# Altium PCB РАЗВОДКА 2.PcbDoc (part 2 of 2)
Units mm, origin at the board's own origin, x right, y up, seen from the top; angles counter-clockwise.
Board outline 81.25 x 50.02 mm, 2 copper layers (Top Layer, Bottom Layer); 71 components, 46 nets, 302 pads, 66 vias.
Unrouted connection lines stored in the file: 1.
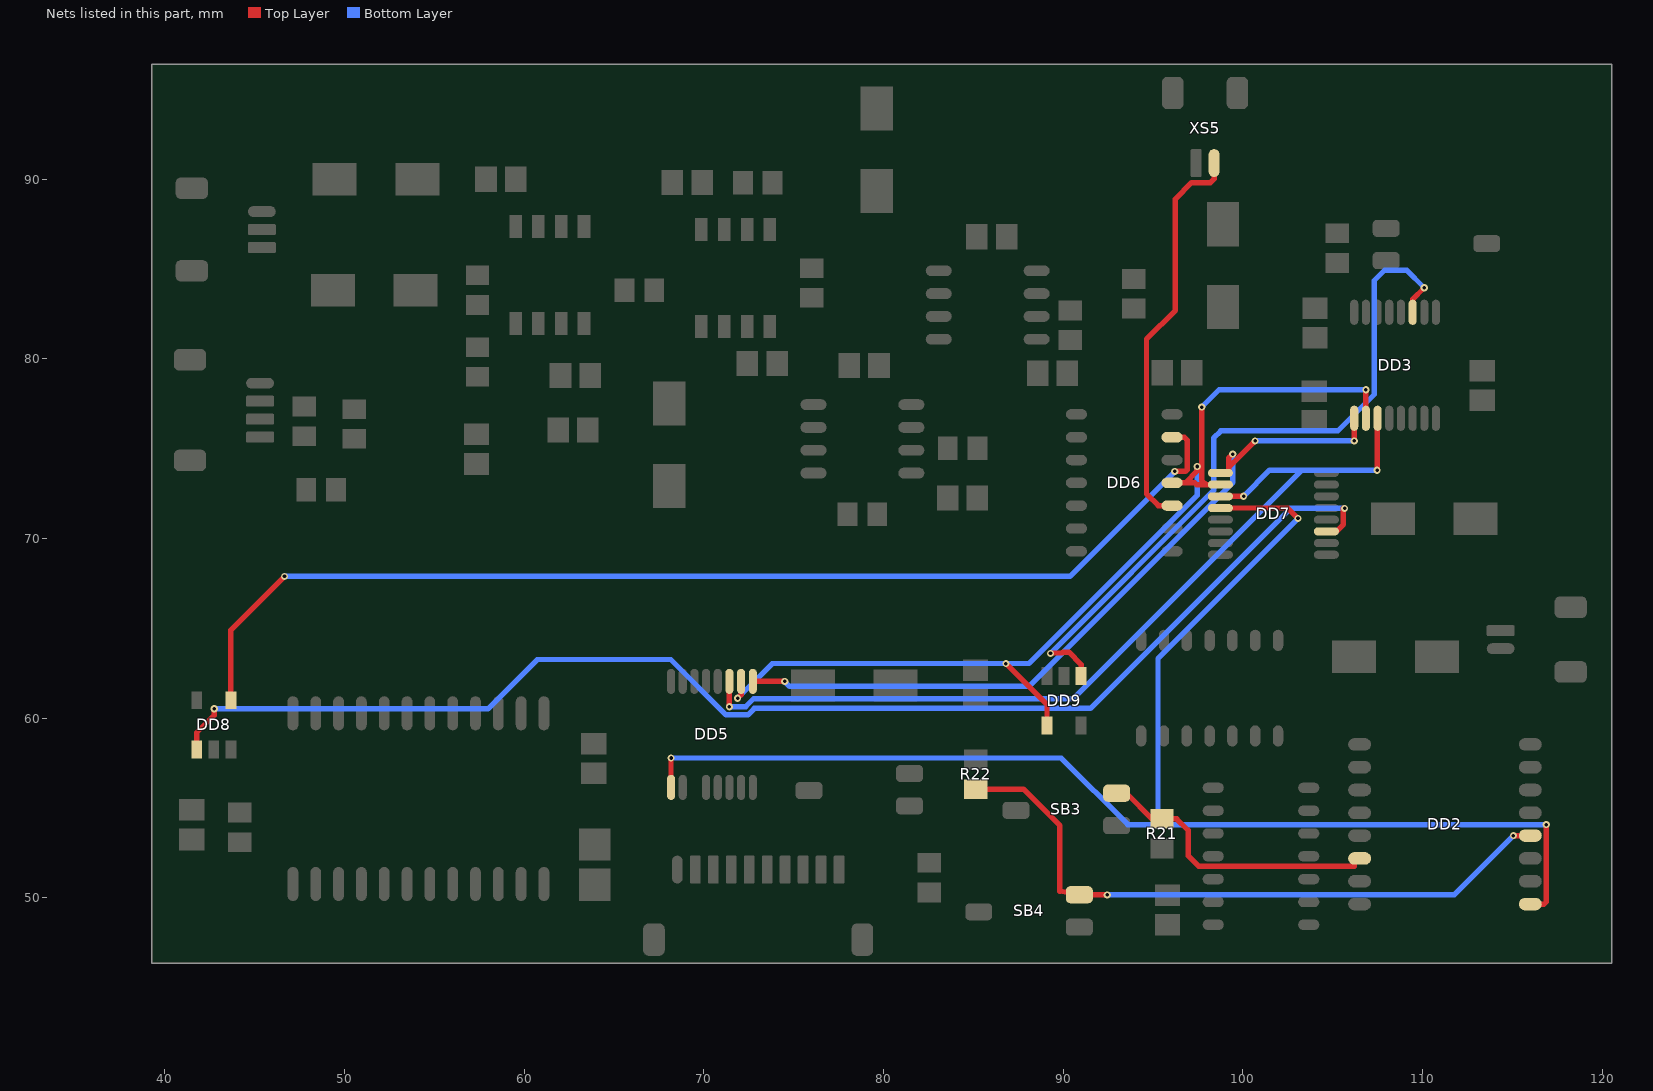
[diagram p2: the nets of this part, all layers, seen from the top]

## Via types
v1: diameter 0.4, hole 0.2, Top Layer to Bottom Layer, 62 vias
v2: diameter 3.8, hole 3.8, Top Layer to Bottom Layer, 4 vias

## Nets (pads, with @x,y where several pads share a name; then routed paths per layer and width w, separated by ;. In a path a pad name is that pad's centre, name@x,y a point inside that pad or via, vN(x,y) a via of type N, cw(c..) or ccw(c..) an arc to the next point about the centre after c; other vN are vias at no path point) (continued)
NetDD2_6: DD2.6 R21.1 SB3.2 | length 16.5
  Top Layer w0.3: SB3.2@92.975,55.825 93.523,55.825 94.948,54.4 R21.1@95.5,54.4 96.317,54.4 96.952,53.765 96.952,52.349 97.536,51.765 106.197,51.765 106.197,52.195 DD2.6@106.5,52.195
NetDD2_9: DD2.9 DD5.1 DD7.12 | length 82.2
  Top Layer w0.3: DD5.1@68.175,56.15 v1(68.175,57.785) ; DD7.12@98.75,71.7 102.493,71.7 v1(103.073,71.12) ; DD2.9@116,49.655 116.762,49.655 116.891,49.784 v1(116.891,54.077)
  Bottom Layer w0.3: v1(68.175,57.785) 89.891,57.785 93.599,54.077 95.91,54.077 ; v1(103.073,71.12) 95.275,63.322 95.275,54.712 95.91,54.077 ; v1(116.891,54.077) 95.91,54.077
NetDD2_12: DD2.12 R22.1 SB4.2 | length 36.8
  Top Layer w0.3: R22.1@85.125,56.05 87.79,56.05 89.814,54.026 89.814,50.378 SB4.2@90.9,50.175 92.446,50.175 v1(92.456,50.165) ; v1(115.062,53.465) DD2.12@116,53.465
  Bottom Layer w0.3: v1(92.456,50.165) 111.762,50.165 v1(115.062,53.465)
NetDD3_3: DD3.3 DD9.1 | length 39.7
  Top Layer w0.3: v1(89.297,63.611) 89.316,63.63 89.943,63.63 89.991,63.678 90.314,63.678 91,62.992 DD9.1@91,62.35 ; DD3.3@109.45,82.594 109.45,83.312 v1(110.097,83.959)
  Bottom Layer w0.3: v1(89.297,63.611) 98.374,72.688 98.374,75.59 98.781,75.997 105.283,75.997 107.315,78.029 107.315,84.353 107.899,84.938 109.118,84.938 v1(110.097,83.959)
NetDD3_9: DD3.9 DD5.9 DD7.9 | length 43.6
  Top Layer w0.3: DD5.9@72.725,62.05 72.725,62.052 v1(74.498,62.052) ; DD7.9@98.75,73.65 99.212,73.65 99.212,73.965 ; v1(99.441,74.701) 99.212,74.473 99.212,73.965 ; v1(100.686,75.438) 99.212,73.965 ; v1(106.2,75.438) DD3.9@106.2,76.694
  Bottom Layer w0.3: v1(74.498,62.052) 74.778,61.773 88.096,61.773 99.441,73.118 v1(99.441,74.701) ; v1(100.686,75.438) v1(106.2,75.438)
NetDD3_10: DD3.10 DD5.10 DD6.11 DD7.10 DD9.4 | length 56.7
  Top Layer w0.3: v1(71.882,61.112) 72.075,61.305 DD5.10@72.075,62.05 ; v1(86.814,63.043) 89.1,60.757 DD9.4@89.1,59.6 ; DD6.11@96.06,73.1 96.797,73.1 ; v1(97.459,74.008) 97.459,73.762 96.797,73.1 ; v1(97.714,77.318) 97.714,73.229 97.942,73 ; DD7.10@98.75,73 97.942,73 ; DD3.10@106.85,76.694 v1(106.85,78.283) ; 96.797,73.1 97.333,73.1 97.433,73 97.942,73
  Bottom Layer w0.3: v1(71.882,61.112) 73.812,63.043 v1(86.814,63.043) 88.093,63.043 97.459,72.409 v1(97.459,74.008) ; v1(97.714,77.318) 98.679,78.283 v1(106.85,78.283)
NetDD3_11: DD3.11 DD5.11 DD7.11 | length 51
  Top Layer w0.3: v1(71.425,60.641) DD5.11@71.425,62.05 ; DD7.11@98.75,72.35 v1(100.04,72.35) ; v1(107.475,73.805) 107.487,73.818 107.487,76.681 DD3.11@107.5,76.694
  Bottom Layer w0.3: v1(71.425,60.641) 72.332,60.641 72.779,61.087 90.576,61.087 103.295,73.805 ; v1(100.04,72.35) 101.495,73.805 103.295,73.805 ; v1(107.475,73.805) 103.295,73.805
NetDD6_10: DD6.10 XS5.1 | length 22.3
  Top Layer w0.3: DD6.10@96.06,71.83 95.301,71.83 94.64,72.49 94.64,81.102 96.241,82.702 96.241,88.9 97.155,89.814 98.197,89.814 98.4,90.018 XS5.1@98.4,90.9
NetDD6_13: DD6.13 DD8.4 | length 63.4
  Top Layer w0.3: DD8.4@43.675,61 43.675,64.909 v1(46.66,67.894) ; DD6.13@96.06,75.64 96.749,75.64 96.9,75.489 96.9,73.838 96.798,73.736 v1(96.215,73.736)
  Bottom Layer w0.3: v1(46.66,67.894) 90.373,67.894 v1(96.215,73.736)
NetDD7_3: DD7.3 DD8.1 | length 74.8
  Top Layer w0.3: DD8.1@41.775,58.25 41.775,59.199 42.75,60.174 v1(42.75,60.525) ; DD7.3@104.65,70.4 105.207,70.4 105.6,70.793 105.6,71.679 v1(105.664,71.679)
  Bottom Layer w0.3: v1(42.75,60.525) 57.985,60.525 60.731,63.271 68.158,63.271 71.239,60.191 72.448,60.191 72.811,60.554 91.517,60.554 102.642,71.679 v1(105.664,71.679)
pads on no net: DA6.5 DA6.8 DA7.5 DA7.8 DA33.2 DA33.3 DA33.4 DA33.5 DA33.23 DD1.11 DD1.12 DD1.13 DD2.2 DD2.3 DD2.5 DD2.7 DD2.11 DD2.15 DD3.6 DD4.1 DD4.2 DD4.3 DD4.4 DD4.5 DD4.6 DD4.8 DD4.9 DD4.10 DD4.11 DD4.12 DD4.13 DD5.6 DD6.1 DD6.2 DD6.3 DD6.4 DD6.5 DD6.6 DD6.7 DD6.8 DD6.9 DD6.14 DD7.6 DD8.3 DD9.3 SB1.3 SB2.3 SB3.3 SB4.3 XS1.11 XS1.12 XS2.3 XS2.4 XS3.4 XS3.5 XS4.5 XS4.6 XS5.3 XS5.4
copper on no net:
  other v2: 42.3,49.2 117.675,70.725 116.8,93 42.3,93.55

## Polygon pours and split planes (outlines as drawn)
"+5V A" on Bottom Layer "+5V_A_L02_P018" (solid, pour order 18): 39.275,65.625 89.2,65.625 89.2,78.1 91.475,78.1 91.475,81.8 91.5,81.775 94.875,81.775 94.875,96.375 39.275,96.375
no net on Bottom Layer "NONET_L02_P017" (solid, pour order 17): 39.275,65.625 89.2,65.625 89.2,78.1 91.475,78.1 91.475,81.8 91.5,81.775 94.875,81.775 94.875,96.375 39.275,96.375
D on Bottom Layer "D_L02_P015" (solid, pour order 15): 39.275,65.2 39.275,46.375 120.5,46.375 120.525,46.4 120.5,46.425 120.5,96.375 95.35,96.375 95.3,96.325 95.3,81.5 91.9,81.5 91.9,77.7 92.1,77.5 89.6,77.5 89.6,65.2
A on Bottom Layer "GND A" (solid, shelved, pour order 7): 39.275,46.375 39.275,96.4 142.075,96.4 142.075,46.375
A on Top Layer "A_L01_P016" (solid, pour order 16): 39.275,65.625 89.2,65.625 89.2,78.1 91.475,78.1 91.475,81.8 91.5,81.775 94.875,81.775 94.875,96.375 39.275,96.375
"+5V D" on Top Layer "+5V_D_L01_P014" (solid, pour order 14): 39.275,65.2 39.275,46.375 120.5,46.375 120.525,46.4 120.5,46.425 120.5,96.375 95.35,96.375 95.3,96.325 95.3,81.5 91.9,81.5 91.9,77.7 92.1,77.5 89.6,77.5 89.6,65.2
A on Top Layer "GND A" (solid, shelved, pour order 6): 38.981,46.316 38.981,96.341 141.781,96.341 141.781,46.316

## Other copper
Top Layer:
  pour cut-out: 89.6,67.639 90.479,67.639 96.283,73.444 96.323,73.444 96.521,73.642 96.521,73.83 96.431,73.92 96.431,73.952 96.399,73.952 96.332,74.019 96.065,74.019 95.923,73.876 95.923,73.804 90.268,68.149 89.6,68.149
Bottom Layer:
  pour cut-out: 50.113,65.625 50.623,65.625 50.623,73.046 51.63,74.053 51.702,74.053 51.702,74.086 51.792,74.176 51.792,74.363 51.702,74.453 51.702,74.486 51.683,74.486 51.419,74.75 51.331,74.75 51.331,74.556 50.113,73.338
  pour cut-out: 44.917,65.625 44.917,65.694 44.868,65.742 46.728,67.602 46.767,67.602 46.942,67.777 46.942,68.044 46.81,68.177 46.51,68.177 46.377,68.044 46.377,67.972 44.03,65.625
  pour cut-out: 64.13,65.625 63.62,65.625 63.62,71.173 61.665,73.129 61.665,73.234 61.645,73.254 61.645,75.144 62.282,74.507 62.224,74.449 62.178,74.449 62.178,73.382 62.155,73.359 64.11,71.404 64.11,71.298 64.13,71.279
  pour cut-out: 61.355,65.625 60.845,65.625 60.845,70.862 60.555,71.153 60.555,71.258 60.535,71.278 60.535,81.235 61.045,81.235 61.045,71.383 61.335,71.093 61.335,70.987 61.355,70.968
  pour cut-out: 95.3,96.85 94.9,96.85 94.9,81.8 92.608,81.8 91.5,81.8 91.5,78.1 89.792,78.1 89.2,78.1 89.2,65.6 63.675,65.6 39.275,65.6 39.275,65.2 64.075,65.2 89.6,65.2 89.6,77.692 91.9,77.692 91.9,81.5 95.3,81.5
  pour cut-out: 89.725,77.5 89.687,77.5 89.6,77.587 89.704,77.692 89.917,77.692 89.725,77.5 89.687,77.5 89.6,77.587
  pour cut-out: 89.6,77.587 89.704,77.692 89.917,77.692 89.725,77.5 91.975,77.5 91.975,77.617 91.9,77.692 89.6,77.692

## Silkscreen, mask and mechanical layers (free items; w line width, h text height)
Top Overlay:
  lines w0.1: 48.75,74.825 48.75,78.175 46.8,78.175 46.8,74.85 48.75,74.85 ; 51.5,74.8 51.5,78.15 49.55,78.15 49.55,74.825 51.5,74.825 ; 83.525,49.475 83.525,52.825 81.575,52.825 81.575,49.5 83.525,49.5 ; 102.625,64.669 102.625,66.619 ; 40.525,52.425 42.475,52.425 42.475,55.75 40.525,55.75 40.525,52.425 ; 43.2,52.3 43.2,55.625 45.15,55.625 45.15,52.3 43.2,52.3 ; 47,71.75 50.325,71.75 50.325,73.7 47,73.7 47,71.75 ; 56.329,73.2 58.279,73.2 58.279,76.525 56.329,76.525 56.329,73.2 ; 56.379,78.15 56.379,81.475 58.329,81.475 58.329,78.15 56.379,78.15 ; 56.454,82.2 56.454,85.525 58.404,85.525 58.404,82.2 56.454,82.2 ; 56.975,89.075 56.975,91.025 60.3,91.025 60.3,89.075 56.975,89.075 ; 61.125,75.05 64.45,75.05 64.45,77 61.125,77 61.125,75.05 ; 61.225,78.025 61.225,79.975 64.55,79.975 64.55,78.025 61.225,78.025 ; 62.725,49.5 65.125,49.5 65.125,54.15 62.725,54.15 62.725,49.5 ; 62.875,56 62.875,59.325 64.825,59.325 64.825,56 62.875,56 ; 64.759,82.8 68.084,82.8 68.084,84.675 64.759,84.675 64.759,82.8 ; 67.35,88.825 67.35,90.775 70.675,90.775 70.675,88.825 67.35,88.825 ; 71.2,88.8 71.2,90.75 74.525,90.75 74.525,88.8 71.2,88.8 ; 71.7,78.8 71.7,80.75 75.025,80.75 75.025,78.8 71.7,78.8 ; 74.95,82.6 74.95,85.925 77.025,85.925 77.025,82.6 74.95,82.6 ; 77.175,70.4 77.175,72.35 80.5,72.35 80.5,70.4 77.175,70.4 ; 77.25,78.625 77.25,80.575 80.575,80.575 80.575,78.625 77.25,78.625 ; 82.725,74.025 82.725,75.975 86.05,75.975 86.05,74.025 82.725,74.025 ; 82.8,71.3 82.8,73.25 86.125,73.25 86.125,71.3 82.8,71.3 ; 84.075,55.15 84.075,58.475 86.025,58.475 86.025,55.15 84.075,55.15 ; 84.125,60.225 84.125,63.55 86.075,63.55 86.075,60.225 84.125,60.225 ; 84.325,85.875 84.325,87.825 87.65,87.825 87.65,85.875 84.325,85.875 ; 87.8,78.2 87.8,80.15 91.125,80.15 91.125,78.2 87.8,78.2 ; 89.5,80.475 89.5,83.875 91.45,83.875 91.45,80.475 89.5,80.475 ; 93,82 93,85.325 94.95,85.325 94.95,82 93,82 ; 94.525,51.944 96.475,51.944 96.475,55.269 94.525,55.269 94.525,51.944 ; 94.675,78.175 94.675,80.125 98,80.125 98,78.175 94.675,78.175 ; 94.875,47.725 96.825,47.725 96.825,51.05 94.875,51.05 94.875,47.725 ; 103.025,75.694 103.025,79.019 104.975,79.019 104.975,75.694 103.025,75.694 ; 103.05,80.369 103.05,83.694 105,83.694 105,80.369 103.05,80.369 ; 104.275,84.344 104.275,87.669 106.225,87.669 106.225,84.344 104.275,84.344 ; 112.225,76.819 112.225,80.144 114.175,80.144 114.175,76.819 112.225,76.819
Bottom Overlay:
  lines w0.254: 35.175,94.85 35.675,96.45 ; 35.191,47.822 35.675,46.275 ; 35.7,96.5 35.7,46.27 39.17,46.27 ; 35.741,46.353 36.225,47.9 ; 35.75,96.4 36.234,94.853 ; 39.15,42.825 120.55,42.825 ; 39.2,42.8 40.8,42.3 ; 39.25,42.875 40.797,43.359 ; 119,43.35 120.547,42.866 ; 119.078,42.316 120.625,42.8 ; 120.65,42.866 120.65,46.695
  lines w0.3: 35.7,96.5 39.2,96.5 ; 39.15,42.825 39.15,46.325
  lines w0.5: 39.275,46.375 39.275,96.4 120.525,96.4 120.525,46.375 39.3,46.375
  text "50" at 34.85,69.275 h1.52 r90
  text "105" at 88.525,43.825 h1.52
Mechanical 7:
  lines w0.254: 624.025,2440.25 624.025,2428.175 634.2,2428.175 634.2,2440.225 624.05,2440.225 ; 477.175,2472.375 477.2,2472.4 487.3,2472.4 487.3,2487.85 477.175,2487.85 477.175,2472.375 ; 478.275,2454.8 485.95,2454.8 486,2454.85 486,2465.9 478.275,2465.9 478.275,2454.8 ; 536.9,2402.25 536.925,2402.225 546.9,2402.225 546.95,2402.275 546.95,2410.5 536.9,2410.5 536.9,2408.975 536.9,2402.25
  text "BOASFORMAT|А3|1|0|883070867|165354330|1000000000|2:1|" at 0,2540 h0
  text "BOASFORMAT|А3|101|165354330|883070867|330708660|1000000000|2:1|" at 420,2540 h0
  text "DimPos|235698819|977667323|-1988189|-11072834|3|1537097" at 603.725,2511.4 h0
  text "DimPos|238513780|976338583|-5039370|-12401574|53|2865525" at 618.625,2511.4 h0
  text "DimPos|218592520|981466535|826772|-6200788|3|1537097" at 553.125,2508.675 h0
  text "DimPos|242893701|976919291|-5127953|-10669292|5|1742827" at 629.975,2508.475 h0
  text "DimPos|224124016|976584646|-2726378|-10836614|27|3406301" at 576.2,2508.05 h0
  text "DimPos|195767717|980561024|3307087|-6446850|3|1537097" at 488.85,2507 h0
  text "DimPos|210236220|978986220|6368110|-7027560|17|2409980" at 517.825,2504.475 h0
  text "DimPos|213631890|978986220|2234252|-7027560|55|3071255" at 536.95,2504.475 h0
  text "DimPos|229419291|974685039|-2647638|-10580709|41|2736209" at 589.45,2502.575 h0
  text "DimV|-29527|-39340551|79891732|984183071|8740158|-19803150|2||||js12|False|False|False|False" at 202.925,2499.825 h0
  text "DimPos|241318898|969724409|-14055118|-11742126|23|3030109" at 648.65,2492.925 h0
  text "DimPos|189566929|977332677|4714567|-1820866|13|2033788" at 469.525,2487.05 h0
  text "DimPos|244881890|969399606|-10748031|-4960630|17|2409980" at 649.3,2474.875 h0
  text "DimPos|242559055|965098425|-16210630|-6525591|3|1537097" at 657.275,2467.925 h0
  text "DimPos|189320866|969311024|6692913|1318898|15|2239518" at 463.875,2458.7 h0
  text "DimPos|235285433|957903543|-21830709|-7194882|33|2865525" at 653.075,2451.35 h0
  text "DimPos|244301181|958651575|-17027559|-3061023|3|1537097" at 663.775,2442.75 h0
  text "DimPos|189320866|955757874|7194882|1988189|37|3241717" at 462.6,2422.575 h0
  text "DimPos|248021654|956751969|-12982283|7027560|9|1454805" at 662.95,2412.3 h0
  text "DimPos|188907480|950629921|8346456|2559055|17|2409980" at 458.625,2408.1 h0
  text "DimH|-63937008|0|79891732|944842520|-32440945|-9212599|2||||js12|False|False|False|False" at 202.925,2399.9 h0
  text "DimPos|189980315|950216535|1564961|7933070|49|3115340" at 478.575,2393.4 h0
  text "DimPos|222618110|952352362|7047244|10521653|53|2865525" at 547.55,2392.25 h0
  text "DimPos|205777559|953356299|6289370|11407480|17|2409980" at 508.021,2391.47 h0
  text "DimPos|224872047|948415354|1968504|7421260|5|1742827" at 566.175,2390.125 h0
  text "DimPos|226702756|950570866|3868110|9596457|5|1742827" at 566,2390.075 h0
  text "DimPos|205856299|948484252|1574803|7608268|19|2283603" at 520.8,2387.945 h0
  text "DimPos|198661417|949222441|4212598|9753937|25|3235839" at 490.194,2386.92 h0
  text "DimPos|244931102|947814961|-11240158|8631890|39|3115340" at 650.675,2385.525 h0
  text "DimPos|220639764|947687008|5994095|10196851|53|2865525" at 545.2,2381.225 h0
  text "DimPos|231318898|946397638|3572835|10787402|17|2409980" at 578.475,2376.45 h0
  text "DimPos|234143701|946397638|-748031|10856299|35|3071255" at 596.625,2376.275 h0
  text "DimPos|230797244|949753937|10787401|14370079|53|2865525" at 558.825,2375.875 h0
  text "DimPos|211397638|953188976|3809055|18435039|23|3030109" at 527.275,2374.275 h0
  text "DimV|19685|-364173|80285433|927234252|3051181|29528|2||||js12|False|False|False|False" at 203.925,2355.175 h0
  text "SET2|Superlayer=MechanicalLayer7|Wsuperlayer=MechanicalLayer8|Layergrid=MechanicalLayer9|Werase=MechanicalLayer11|Layermark=MechanicalLayer12|Layerstamp=MechanicalLayer13|Thinline=0,18|Basicline=0,6|Gridline=0,18|Boardline=0,6|Contourpolygonline=0,6|PcbGridStep=1,25|PcbGridCleareanceAtView=0|PcbGridNumberEach=l4|PcbGridLineEach=l2|PcbGridCountSecondaryStrip=1|PcbGridEnabledStrip=True|PcbSignalGridEnabled=True|PcbSignalShowBukva=True|RealSignalLayerNames=False|PcbGridEnabledBothSide=False|RealLayerNames=False|SilkShowPad=True|SilkViewName=Слой маркировки|SilkShowHole=True|SilkShowAxis=True|SilkShowBukva=True|SilkShowGrid=False|SolderShowGrid=False|SolderViewName=Слой маски|SolderShowAxis=False|SolderShowBukva=False|MainViewShowGrid=False|MainViewUseShapesDrill=False|ShowBukvaOnSboky=True|Density=2,2|TableName=Таблица 1|RazrezWidth=100|Sher=Rz 160|Asstoplayer=MechanicalLayer15|Asstoplayer2=None|Assbottomlayer=MechanicalLayer2|Assbottomlayer2=None|AssMinDiameterHoles=2|AssDim=True|AssMech=False|AssSilk=False|AssComponentSilk=False|AssFreeSilk=False|AssSmdPads=False|AssGridEnable=False|Mirror=Horisontal|PcbGridFontSize=5|PcbGridCenterZero=False|TTStampDistance=12|MainFontSize=5|PolyStep=2|PcbDrillDrawingGridEnabled=False|PcbDrillDrawingViewName=Слой сверловки|PcbDrillDrawingShowBukva=False|PcbDrillDrawingShowAxis=False|PcbSignalLayersUseDrill=False|PcbSignalLayersUseShapesDrill=False|PcbSignalLayersShowAxis=False" at 0,0.025 h0
  text "2TT0007#  8 Клеймить." at 0,0 h0
  text "2TT0006#  7 Маркировать обозначение и заводской номер печатного узла черной краской МКЭ ОСТ 4ГО.054.2050М2 шрифтом 3,5 или 5 тип А ГОСТ 2.304-81, вместе, удобном для чтения." at 0,0 h0
  text "2TT0005#  6 Покрытие лак УР-231 ТУ6-21-14-90(3). Допускается покрытие лаком ЭП-730 ГОСТ 20824-81(3)." at 0,0 h0
  text "2TT0004#  5 Элементы поверхностного монтажа паять припойной пастой ПОС-61 ЛОК ТУ 400 К''Р''-1805-22-91, флюс ФПС-3 ТУ400 СП \"ЭВ\"-2178-137-98." at 0,0 h0
  text "2TT0003#  4 Меры защиты от статического электричества по ОСТ 92-1615-74. Степень жесткости II по ОСТ11.073.062-2001." at 0,0 h0
  text "2TT0002#  3** Размеры обеспеч. инстр." at 0,0 h0
  text "2TT0001#  2* Размеры для справок." at 0,0 h0
  text "2TT0000#  1 Установку элементов производить по чертежу." at 0,0 h0
  text "TT0008#  9 Покрытие проводящего рисунка платы Хим. Мм." at 0,0 h0
  text "TT0007#  8 Допускается полное или частичное заполнение припоем переходных отверстий, их диаметры контролю не подлежат." at 0,0 h0
  text "TT0006#  7  Предельные отклонения расстояний между центрами отверстий ±0,2 мм, кроме оговоренных особо." at 0,0 h0
  text "TT0005#  6 Форма контактной площадки произвольная. Допускается занижение контактных площадок до 0,05 мм от края отверстия." at 0,0 h0
  text "TT0004#  5 Расстояние между печатными проводниками и контактными площадками не менее 0,2 мм." at 0,0 h0
  text "TT0003#  4 Печатная плата должна соответствовать ГОСТ Р 53429-2009, группе жесткости 3 при верхнем значении температуры окружающей среды (85±2) °С." at 0,0 h0
  text "TT0002#  3 Класс точности 3 по ГОСТ Р 53429-2009." at 0,0 h0
  text "TT0001#  2 ** Размер обеспеч. инстр." at 0,0 h0
  text "TT0000#  1 *  Размер для справок." at 0,0 h0
  text "BOASVIADRILLTABLE:triangle,78740,62,|none,1496063,4," at 0,0 h0
  text "2BOASDRILLTABLE:" at 0,0 h0
Mechanical 8:
  region: 211.767,2355.267 212.414,2356.96 212.905,2360.674 211.771,2360.675 211.77,2359.743 212.333,2360.175 211.678,2355.268
  region: 211.583,2355.267 210.936,2356.96 210.445,2360.674 211.579,2360.675 211.58,2359.743 211.017,2360.175 211.672,2355.268
  region: 211.583,2354.158 210.936,2352.465 210.445,2348.751 211.579,2348.75 211.58,2349.682 211.017,2349.25 211.672,2354.157
  region: 211.767,2354.158 212.414,2352.465 212.905,2348.751 211.771,2348.75 211.77,2349.682 212.333,2349.25 211.678,2354.157
  region: 225.217,2399.992 225.864,2401.685 226.355,2405.399 225.221,2405.4 225.22,2404.468 225.783,2404.9 225.128,2399.993
  region: 225.033,2399.992 224.386,2401.685 223.895,2405.399 225.029,2405.4 225.03,2404.468 224.467,2404.9 225.122,2399.993
  region: 225.033,2499.733 224.386,2498.04 223.895,2494.326 225.029,2494.325 225.03,2495.257 224.467,2494.825 225.122,2499.732
  region: 225.217,2499.733 225.864,2498.04 226.355,2494.326 225.221,2494.325 225.22,2495.257 225.783,2494.825 225.128,2499.732
  region: 202.833,2376.592 201.14,2377.239 197.426,2377.73 197.425,2376.596 198.357,2376.595 197.925,2377.158 202.832,2376.503
  region: 202.833,2376.408 201.14,2375.761 197.426,2375.27 197.425,2376.404 198.357,2376.405 197.925,2375.842 202.832,2376.497
  region: 40.617,2376.408 42.31,2375.761 46.024,2375.27 46.025,2376.404 45.093,2376.405 45.525,2375.842 40.618,2376.497
  region: 40.617,2376.592 42.31,2377.239 46.024,2377.73 46.025,2376.596 45.093,2376.595 45.525,2377.158 40.618,2376.503
Mechanical 9:
  circle w0.6: c536.95,2421.1 r0.2
  circle w0.6: c524.8,2407.27 r0.2
  circle w0.6: c523.996,2420.445 r0.2
  circle w0.6: c500.894,2411.695 r0.2
  circle w0.6: c482.55,2413.55 r0.2
  circle w0.6: c479.825,2414.6 r0.2
  circle w0.6: c480.875,2427.625 r0.2
  circle w0.6: c480.875,2462.05 r0.2
  circle w0.6: c481.5,2482.425 r0.2
  circle w0.6: c497.25,2490.625 r0.2
  circle w0.6: c534,2486.625 r0.2
  circle w0.6: c542.625,2486.625 r0.2
  circle w0.6: c555.225,2492.925 r0.2
  circle w0.6: c582.725,2475.7 r0.2
  circle w0.6: c569.275,2480.525 r0.2
  circle w0.6: c598.675,2483.275 r0.2
  circle w0.6: c605.825,2479.9 r0.2
  circle w0.6: c616.95,2481.375 r0.2
  circle w0.6: c622,2462.275 r0.2
  circle w0.6: c612.95,2463.1 r0.2
  circle w0.6: c616.1,2451.35 r0.2
  circle w0.6: c597.625,2433.075 r0.2
  circle w0.6: c620.525,2434.975 r0.2
  circle w0.6: c629.975,2430.15 r0.2
  circle w0.6: c565.45,2418.975 r0.2
  circle w0.6: c560.425,2407.125 r0.2
  circle w0.6: c571.175,2408.975 r0.2
  circle w0.6: c575.825,2414.45 r0.2
  circle w0.6: c586.225,2412.375 r0.2
  circle w0.6: c587.55,2403.85 r0.2
  circle w0.6: c594.725,2403.85 r0.2
  circle w0.6: c622.125,2407.45 r0.2
  region: 211.675,2355.175 211.017,2360.175 211.675,2359.675 212.333,2360.175
  region: 211.675,2354.25 212.333,2349.25 211.675,2349.75 211.017,2349.25
  region: 225.125,2399.9 224.467,2404.9 225.125,2404.4 225.783,2404.9
  region: 225.125,2499.825 225.783,2494.825 225.125,2495.325 224.467,2494.825
  region: 202.925,2376.5 197.925,2375.842 198.425,2376.5 197.925,2377.158
  region: 40.525,2376.5 45.525,2377.158 45.025,2376.5 45.525,2375.842
  lines w0.18: 40.525,2375.5 40.525,2399.9 ; 40.525,2376.5 202.925,2376.5 ; 202.85,2499.825 226.125,2499.825 ; 202.925,2375.5 202.925,2399.9 226.125,2399.9 ; 203.925,2355.175 212.675,2355.175 ; 203.975,2354.25 212.675,2354.25 ; 211.675,2346.25 211.675,2374.148 ; 225.125,2399.9 225.125,2499.825 ; 447.504,2408.1 458.625,2408.1 479.825,2414.6 ; 449.366,2422.575 462.6,2422.575 480.875,2427.625 ; 453.187,2458.7 463.875,2458.7 480.875,2462.05 ; 459.359,2487.05 469.525,2487.05 481.5,2482.425 ; 465.662,2393.4 478.575,2393.4 482.55,2413.55 ; 476.975,2386.92 490.194,2386.92 500.894,2411.695 ; 479.946,2507 488.85,2507 497.25,2490.625 ; 496.9,2391.47 508.021,2391.47 523.996,2420.445 ; 506.704,2504.475 517.825,2504.475 534,2486.625 ; 510,2387.945 520.8,2387.945 524.8,2407.27 ; 514.579,2374.275 527.275,2374.275 536.95,2421.1 ; 524.149,2504.475 536.95,2504.475 542.625,2486.625 ; 532.922,2381.225 545.2,2381.225 560.425,2407.125 ; 535.272,2392.25 547.55,2392.25 565.45,2418.975 ; 544.221,2508.675 553.125,2508.675 555.225,2492.925 ; 546.547,2375.875 558.825,2375.875 586.225,2412.375 ; 556.573,2390.075 566,2390.075 575.825,2414.45 ; 556.748,2390.125 566.175,2390.125 571.175,2408.975 ; 567.354,2376.45 578.475,2376.45 587.55,2403.85 ; 569.275,2480.525 576.2,2508.05 589.852,2508.05 ; 582.725,2475.7 589.45,2502.575 601.4,2502.575 ; 594.725,2403.85 596.625,2376.275 609.426,2376.275 ; 597.625,2433.075 653.075,2451.35 665.353,2451.35 ; 598.675,2483.275 603.725,2511.4 612.629,2511.4 ; 605.825,2479.9 618.625,2511.4 630.903,2511.4 ; 612.95,2463.1 648.65,2492.925 661.346,2492.925 ; 616.1,2451.35 657.275,2467.925 666.179,2467.925 ; 616.95,2481.375 629.975,2508.475 639.402,2508.475 ; 620.525,2434.975 663.775,2442.75 672.679,2442.75 ; 622,2462.275 649.3,2474.875 660.421,2474.875 ; 622.125,2407.45 650.675,2385.525 663.588,2385.525 ; 629.975,2430.15 662.95,2412.3 671.645,2412.3
  text "3" at 606.225,2513.93 h10.75
  text "53" at 621.125,2513.93 h10.75
  text "3" at 546.721,2511.205 h10.75
  text "5" at 632.475,2511.005 h10.75
  text "27" at 578.7,2510.58 h10.75
  text "3" at 482.446,2509.53 h10.75
  text "17" at 509.204,2507.005 h10.75
  text "55" at 526.649,2507.005 h10.75
  text "41" at 591.95,2505.105 h10.75
  text "23" at 651.15,2495.455 h10.75
  text "13" at 461.859,2489.58 h10.75
  text "17" at 651.8,2477.405 h10.75
  text "3" at 659.775,2470.455 h10.75
  text "15" at 455.687,2461.23 h10.75
  text "33" at 655.575,2453.88 h10.75
  text "3" at 666.275,2445.28 h10.75
  text "49,96" at 222.595,2444.062 h7.68 r90
  text "37" at 451.866,2425.105 h10.75
  text "9" at 665.45,2414.83 h10.75
  text "17" at 450.004,2410.63 h10.75
  text "49" at 468.162,2395.93 h10.75
  text "53" at 537.772,2394.78 h10.75
  text "17" at 499.4,2394 h10.75
  text "5" at 559.248,2392.655 h10.75
  text "5" at 559.073,2392.605 h10.75
  text "19" at 512.5,2390.475 h10.75
  text "25" at 479.475,2389.45 h10.75
  text "39" at 653.175,2388.055 h10.75
  text "53" at 535.422,2383.755 h10.75
  text "81,2" at 117.51,2379.03 h7.68
  text "17" at 569.854,2378.98 h10.75
  text "35" at 599.125,2378.805 h10.75
  text "53" at 549.047,2378.405 h10.75
  text "23" at 517.079,2376.805 h10.75
  text "0.5" at 209.145,2361.055 h7.68 r90
Mechanical 13:
  lines w0.18: 230,2253 295,2253 ; 230,2258 295,2258 ; 230,2263 295,2263 ; 230,2268 295,2268 ; 230,2273 295,2273 ; 230,2288 295,2288 ; 230,2293 295,2293 ; 230,2298 295,2298 ; 369.96,2268 369.96,2283 ; 374.98,2268 374.98,2283 ; 391.7,2522.1 394.8,2516.7 400.4,2526.5 ; 650,2253 715,2253 ; 650,2258 715,2258 ; 650,2263 715,2263 ; 650,2268 715,2268 ; 650,2273 715,2273 ; 650,2288 715,2288 ; 650,2293 715,2293 ; 650,2298 715,2298 ; 789.96,2268 789.96,2283 ; 794.98,2268 794.98,2283
  lines w0.6: 8,2273 20,2273 ; 8,2308 20,2308 ; 8,2333 20,2333 ; 8,2358 20,2358 ; 8,2475 20,2475 ; 13,2248 13,2393 ; 13,2415 13,2535 ; 20,2393 8,2393 8,2248 20,2248 ; 20,2415 8,2415 8,2535 20,2535 ; 20,2521 90,2521 90,2535 ; 230,2248 230,2303 415,2303 ; 230,2278 295,2278 ; 230,2283 295,2283 ; 237,2278 237,2303 ; 247,2248 247,2303 ; 270,2248 270,2303 ; 285,2248 285,2303 ; 295,2248 295,2303 415,2303 ; 295,2263 365,2263 415,2263 ; 295,2288 415,2288 ; 344,2524 349,2515 356.6,2529 ; 356.7,2529 407,2529 ; 365,2248 365,2288 ; 365,2268 415,2268 ; 365,2283 380,2283 415,2283 ; 380,2268 380,2288 ; 385.57,2263 385.57,2268 ; 397,2268 397,2288 ; 415,2311 415,2303 ; 428,2273 440,2273 ; 428,2308 440,2308 ; 428,2333 440,2333 ; 428,2358 440,2358 ; 428,2475 440,2475 ; 433,2248 433,2393 ; 433,2415 433,2535 ; 440,2393 428,2393 428,2248 440,2248 ; 440,2415 428,2415 428,2535 440,2535 ; 440,2521 510,2521 510,2535 ; 650,2248 650,2303 835,2303 ; 650,2278 715,2278 ; 650,2283 715,2283 ; 657,2278 657,2303 ; 667,2248 667,2303 ; 690,2248 690,2303 ; 705,2248 705,2303 ; 715,2248 715,2303 835,2303 ; 715,2263 785,2263 835,2263 ; 715,2288 835,2288 ; 785,2248 785,2288 ; 785,2268 835,2268 ; 785,2283 800,2283 835,2283 ; 800,2268 800,2288 ; 805.57,2263 805.57,2268 ; 817,2268 817,2288 ; 835,2311 835,2303 ; 20,2248 415,2248 415,2535 20,2535 ; 20,2248 20,2535 ; 440,2248 835,2248 835,2535 440,2535 ; 440,2248 440,2535
  text "Rz 160" at 356.7,2516.7 h10.75
  text "(" at 388,2516.7 h10.75
  text ")" at 399,2516.7 h10.75
  text "Перв. примен." at 11.976,2494.373 h5.38 r90
  text "Перв. примен." at 431.976,2494.373 h5.38 r90
  text "Справ. №" at 11.976,2437.78 h5.38 r90
  text "Справ. №" at 431.976,2437.78 h5.38 r90
  text "Подп. и дата" at 11.976,2365.961 h5.38 r90
  text "Подп. и дата" at 431.976,2365.961 h5.38 r90
  text "Инв. № дубл." at 11.976,2336.457 h5.38 r90
  text "Инв. № дубл." at 431.976,2336.457 h5.38 r90
  text "1 *  Размер для справок. /   2 ** Размер обеспеч. инстр. /   3 Класс точности 3 по ГОСТ Р 53429-2009. /   4 Печатная плата должна соответствовать ГОСТ Р 53429-2009, группе жесткости 3 при верхнем значении температуры окружающей среды (85±2) °С. /   5 Расстояние между печатными проводниками и контактными площадками не менее 0,2 мм. /   6 Форма контактной площадки произвольная. Допускается занижение контактных площадок до 0,05 мм от края отверстия. /   7  Предельные отклонения расстояний между центрами отверстий ±0,2 мм, кроме оговоренных особо. /   8 Допускается полное или частичное заполнение припоем переходных отверстий, их диаметры контролю не подлежат. /   9 Покрытие проводящего рисунка платы Хим. Мм." at 235,2323 h7.68
  text "1 Установку элементов производить по чертежу. /   2* Размеры для справок. /   3** Размеры обеспеч. инстр. /   4 Меры защиты от статического электричества по ОСТ 92-1615-74. Степень жесткости II по ОСТ11.073.062-2001. /   5 Элементы поверхностного монтажа паять припойной пастой ПОС-61 ЛОК ТУ 400 К''Р''-1805-22-91, флюс ФПС-3 ТУ400 СП \"ЭВ\"-2178-137-98." at 655,2323 h7.68
  text "Взам. инв. №" at 11.976,2311.496 h5.38 r90
  text "Взам. инв. №" at 431.976,2311.496 h5.38 r90
  text "Лит." at 369.328,2284.024 h5.38
  text "Масса" at 384.108,2284.024 h5.38
  text "Масштаб" at 399.133,2284.024 h5.38
  text "Лит." at 789.328,2284.024 h5.38
  text "Масса" at 804.108,2284.024 h5.38
  text "Масштаб" at 819.133,2284.024 h5.38
  text "Подп. и дата" at 11.976,2282.461 h5.38 r90
  text "Подп. и дата" at 431.976,2282.461 h5.38 r90
  text "Изм." at 230.687,2279.024 h5.38
  text "Лист" at 238.024,2279.024 h5.38
  text "№ докум." at 252.271,2279.024 h5.38
  text "Подп." at 273.92,2279.024 h5.38
  text "Дата" at 285.963,2279.024 h5.38
  text "Изм." at 650.687,2279.024 h5.38
  text "Лист" at 658.024,2279.024 h5.38
  text "№ докум." at 672.271,2279.024 h5.38
  text "Подп." at 693.92,2279.024 h5.38
  text "Дата" at 705.963,2279.024 h5.38
  text "Разраб." at 230.533,2273.771 h5.38
  text "Разраб." at 650.533,2273.771 h5.38
  text "3 г" at 385.192,2273.391 h7.68
  text "2:1" at 402.916,2273.391 h7.68
  text "2:1" at 822.916,2273.391 h7.68
  text "Пров." at 230.533,2268.771 h5.38
  text "Пров." at 650.533,2268.771 h5.38
  text "Т.контр." at 230.533,2263.771 h5.38
  text "Лист" at 366.442,2263.771 h5.38
  text "Листов" at 387.485,2263.771 h5.38
  text "1" at 407.424,2263.771 h5.38
  text "Т.контр." at 650.533,2263.771 h5.38
  text "Лист" at 786.442,2263.771 h5.38
  text "Листов" at 807.485,2263.771 h5.38
  text "1" at 827.424,2263.771 h5.38
  text "6 Покрытие лак УР-231 ТУ6-21-14-90(3). Допускается покрытие лаком ЭП-730 ГОСТ 20824-81(3). /   7 Маркировать обозначение и заводской номер печатного узла черной краской МКЭ ОСТ 4ГО.054.2050М2 шрифтом 3,5 или 5 тип А ГОСТ 2.304-81, вместе, удобном для чтения. /   8 Клеймить." at 445,2255 h7.68
  text "Н.контр." at 230.533,2253.771 h5.38
  text "Н.контр." at 650.533,2253.771 h5.38
  text "Инв. № подл." at 11.976,2251.457 h5.38 r90
  text "Инв. № подл." at 431.976,2251.457 h5.38 r90
  text "Утв." at 230.533,2248.771 h5.38
  text "Утв." at 650.533,2248.771 h5.38
  text "Копировал" at 305.533,2243.771 h5.38
  text "Формат А3" at 386.625,2243.771 h5.38
  text "Копировал" at 725.533,2243.771 h5.38
  text "Формат А3" at 806.625,2243.771 h5.38
Drill Drawing:
  lines w0.254: 35.675,96.45 35.675,46.22 39.145,46.22 ; 39.125,42.775 120.525,42.775 ; 39.175,42.75 40.775,42.25 ; 39.225,42.825 40.772,43.309 ; 118.975,43.7 120.522,43.216 ; 119.053,42.875 120.625,42.875 120.625,46.645
  lines w0.3: 35.675,96.45 39.175,96.45 ; 39.125,42.775 39.125,46.275
  lines w0.5: 39.25,46.325 39.25,96.35 120.45,96.35 120.45,46.325 39.275,46.325
  text "50" at 34.825,69.225 h1.52 r90
  text "105" at 88.5,43.775 h1.52

## Text inside footprints (layer, text, board x,y; h text height)
ZBOAS131890726: Mechanical 12 "3,8" at 123.404,2275.341 h7.68; Mechanical 12 "переходное" at 43.847,2275.341 h7.68; Mechanical 12 "Да" at 158.31,2275.341 h7.68; Mechanical 12 "3,8" at 87.296,2275.341 h7.68; Mechanical 12 "4" at 187.647,2275.341 h7.68; Mechanical 12 "0,4" at 123.686,2283.341 h7.68; Mechanical 12 "переходное" at 43.847,2283.341 h7.68; Mechanical 12 "Да" at 158.31,2283.341 h7.68; Mechanical 12 "0,2" at 87.189,2283.341 h7.68; Mechanical 12 "62" at 185.858,2283.341 h7.68; Mechanical 12 "отв." at 184.554,2291.091 h7.68; Mechanical 12 "Кол." at 184.762,2298.591 h7.68; Mechanical 12 "металлизации" at 145.882,2291.091 h7.68; Mechanical 12 "Наличие" at 152.525,2298.591 h7.68; Mechanical 12 "площадки, мм" at 112.224,2291.091 h7.68; Mechanical 12 "Диаметр конт." at 111,2298.591 h7.68; Mechanical 12 "мм" at 87.608,2291.091 h7.68; Mechanical 12 "Диаметр отв.," at 75.649,2298.591 h7.68; Mechanical 12 "отв." at 48.339,2291.091 h7.68; Mechanical 12 "Обозначение" at 39.19,2298.591 h7.68; Mechanical 12 "Таблица 1" at 33.5,2305.95 h7.68
ZBOAS1866194480: Mechanical 7 "C5" at 586.731,2464.41 h4; Mechanical 7 "C6" at 477.135,2414.102 h4; Mechanical 7 "C7" at 564.226,2429.652 h4; Mechanical 7 "C8" at 602.124,2469.94 h4; Mechanical 7 "C9" at 601.985,2460.69 h4; Mechanical 7 "C10" at 585.164,2404.602 h4; Mechanical 7 "C11" at 620.394,2462.99 h4; Mechanical 7 "C13" at 508.391,2455.902 h4; Mechanical 7 "C14" at 519.223,2458.052 h4; Mechanical 7 "C15" at 540.086,2465.452 h4; Mechanical 7 "C16" at 519.357,2464.094 h4; Mechanical 7 "C17" at 562.305,2450.452 h4; Mechanical 7 "C21" at 510.908,2485.952 h4; Mechanical 7 "C22" at 565.385,2479.552 h4; Mechanical 7 "C23" at 551.297,2465.202 h4; Mechanical 7 "C18" at 572.404,2464.352 h4; Mechanical 7 "C24" at 531.687,2485.602 h4; Mechanical 7 "DA33" at 500.846,2417.002 h4; Mechanical 7 "DA6" at 550.865,2456.822 h4; Mechanical 7 "DA7" at 564.656,2471.722 h4; Mechanical 7 "R11" at 551.258,2448.652 h4; Mechanical 7 "R10" at 562.228,2456.002 h4; Mechanical 7 "R13" at 526.365,2473.602 h4; Mechanical 7 "R12" at 545.443,2474.402 h4; Mechanical 7 "R15" at 508.258,2465.602 h4; Mechanical 7 "R16" at 574.329,2469.702 h4; Mechanical 7 "R14" at 539.637,2485.552 h4; Mechanical 7 "R17" at 508.178,2473.602 h4; Mechanical 7 "R18" at 581.318,2473.202 h4; Mechanical 7 "SB1" at 614.965,2478.79 h4; Mechanical 7 "SB2" at 550.542,2417.902 h4; Mechanical 7 "SB3" at 573.704,2415.702 h4; Mechanical 7 "SB4" at 569.644,2404.402 h4; Mechanical 7 "С1" at 615.505,2448.152 h4; Mechanical 7 "С2" at 591.831,2476.34 h4; Mechanical 7 "С3" at 611.144,2432.802 h4; Mechanical 7 "С12" at 496.861,2473.602 h4; Mechanical 7 "С19" at 529.705,2456.402 h4; Mechanical 7 "С25" at 552.59,2489.252 h4; Mechanical 7 "С20" at 496.818,2485.952 h4; Mechanical 7 "DD1" at 589.897,2429.302 h4; Mechanical 7 "DD2" at 615.698,2414.222 h4; Mechanical 7 "DD6" at 580.093,2452.377 h4; Mechanical 7 "DA5" at 516.266,2475.302 h4; Mechanical 7 "DA4" at 537.143,2474.952 h4; Mechanical 7 "DD3" at 610.736,2465.24 h4; Mechanical 7 "DD5" at 533.639,2424.152 h4; Mechanical 7 "DD7" at 596.533,2448.277 h4; Mechanical 7 "R19" at 603.929,2478.29 h4; Mechanical 7 "R20" at 558.292,2408.202 h4; Mechanical 7 "R21" at 584.372,2413.102 h4; Mechanical 7 "R22" at 563.449,2419.702 h4; Mechanical 7 "С4" at 550.984,2429.602 h4; Mechanical 7 "DD4" at 595.421,2410.357 h4; Mechanical 7 "XS1" at 539.344,2405.077 h4; Mechanical 7 "XS2" at 625.846,2434.702 h4; Mechanical 7 "XS4" at 479.898,2460.252 h4; Mechanical 7 "XS5" at 588.936,2491.777 h4; Mechanical 7 "XS3" at 480.008,2480.352 h4; Mechanical 7 "R23" at 481.661,2413.802 h4; Mechanical 7 "R25" at 494.314,2458.702 h4; Mechanical 7 "R26" at 490.693,2451.402 h4; Mechanical 7 "R27" at 488.633,2459.002 h4; Mechanical 7 "C28" at 521.118,2421.452 h4; Mechanical 7 "C29" at 521.179,2409.652 h4; Mechanical 7 "DD8" at 478.457,2425.202 h4; Mechanical 7 "DD9" at 573.518,2427.902 h4